# EAGLE board VCO-v2 (EAGLE 6.6.0)

No outline drawn. Coordinates in mm, seen from the top.
Copper layers (1*16): Top 0.035mm / dielectric 1.5mm / Bottom 0.035mm
Design rules "default": minimum track width 10mil, minimum drill 24mil, track to track 8mil, track to pad 8mil, pad to pad 8mil, via to via 8mil, smd to smd 8mil, copper to edge 40mil, drill to drill 8mil, minimum pad ring 10mil, minimum via ring 8mil, stop-mask expansion 4mil, vias tented up to drill 0mil, thermal gap 10mil

## Placement (x,y rotation side)
E$1  [POTENTIOMETER_TAYDA_6MM]  33.02,25.4 90 top
E$2  [POTENTIOMETER_TAYDA_6MM]  38.1,156.21 0 top
E$3  [POTENTIOMETER_TAYDA_6MM]  38.1,127 0 top
E$4  [POTENTIOMETER_TAYDA_6MM]  38.1,97.79 0 top
E$5  [POTENTIOMETER_TAYDA_6MM]  38.1,68.58 0 top
E$6  [KNOB_BOSS-LARGE]  33.02,25.4 0 top
E$7  [KNBO_BOSS_SMALL]  38.1,68.58 0 top
E$8  [KNBO_BOSS_SMALL]  38.1,97.79 0 top
E$9  [KNBO_BOSS_SMALL]  38.1,127 0 top
E$10  [4U_2]  0,0 0 top
E$11  PWM-MAN  [KNBO_BOSS_SMALL]  38.1,156.21 0 top
E$29  [3.5MM_JACK_TAYDA]  13.97,85.09 270 top
E$30  [3.5MM_JACK_TAYDA]  13.97,54.61 270 top
E$31  [3.5MM_JACK_TAYDA]  13.97,69.85 270 top
E$38  [LED_3MM]  5.08,54.61 180 top
E$39  [LED_3MM]  5.08,69.85 180 top
E$40  [LED_3MM]  5.08,85.09 180 top
E$43  [3.5MM_JACK_TAYDA]  13.97,129.54 270 top
E$44  [3.5MM_JACK_TAYDA]  13.97,114.3 270 top
E$45  [LED_3MM]  5.08,114.3 180 top
E$46  [LED_3MM]  5.08,129.54 180 top
E$47  [3.5MM_JACK_TAYDA]  13.97,160.02 270 top
E$48  [3.5MM_JACK_TAYDA]  13.97,144.78 270 top
E$49  [LED_3MM]  5.08,144.78 180 top
E$50  [LED_3MM]  5.08,160.02 180 top

## Library data of the parts
E$1-E$11 E$29-E$31 E$38-E$40 E$43-E$50 = !synth_panel

## Text on the board
PanelText: CV-B-ATTN | CV-A | CV-B | CV-C-ATTN | CV-C | CV-PWM | CV-PWM-ATTN | SINE | PWM-MAN | TRIANGLE | PWM | CV-A-MANUAL